# EAGLE board water_level (EAGLE 7.3.0)
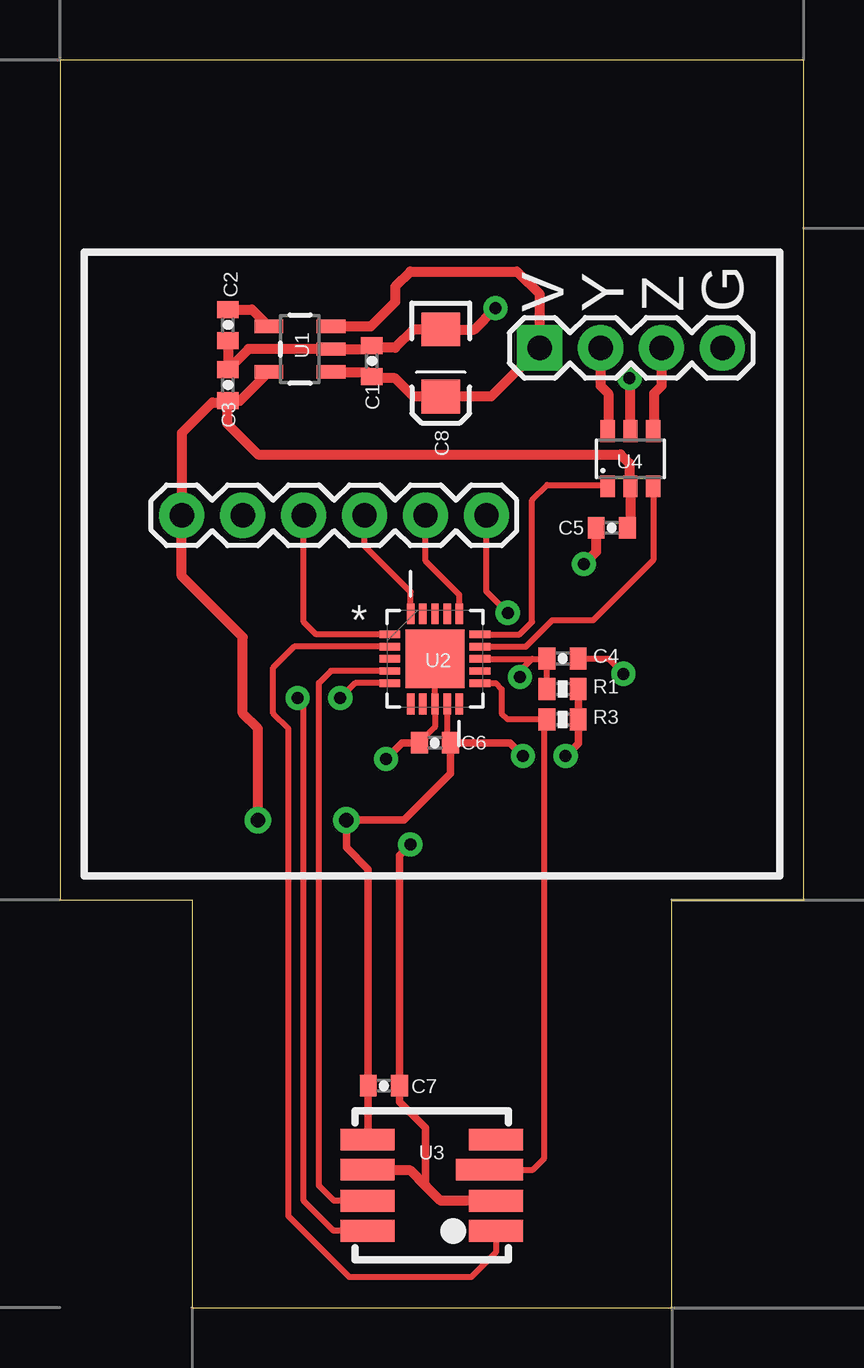
[diagram p0: board, top side]
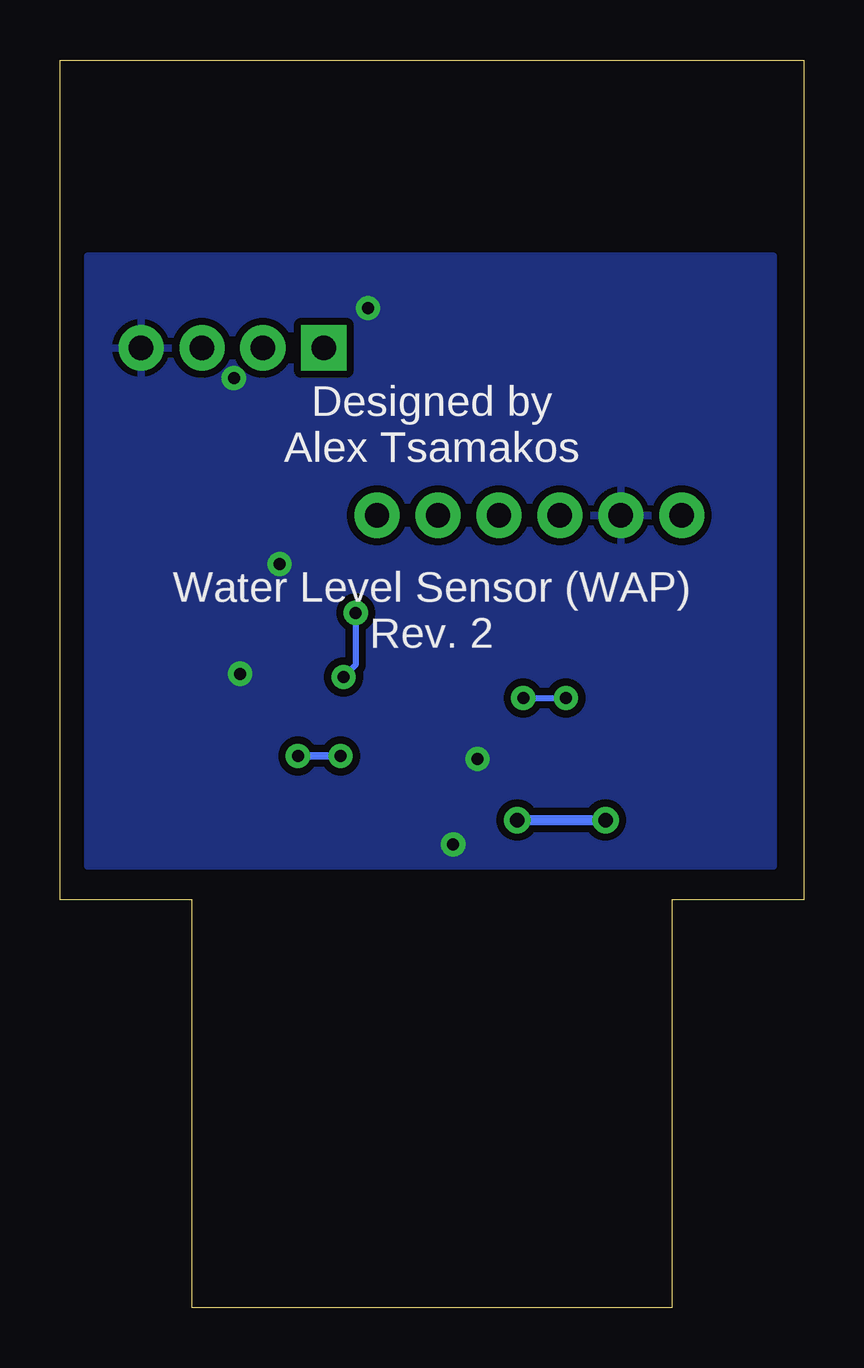
[diagram p1: board, bottom side, seen from below]

Size 31 x 52 mm. Coordinates in mm from the lower left corner, seen from the top.
Outline: 5.5,0 25.5,0 25.5,17 31,17 31,52 0,52 0,17 5.5,17 5.5,0
Copper layers (1*16): Top 0.035mm / dielectric 1.5mm / Bottom 0.035mm
Design rules "SparkFun-2-layer": minimum track width 7mil, minimum drill 15mil, track to track 8mil, track to pad 8mil, pad to pad 8mil, via to via 8mil, smd to smd 8mil, copper to edge 8mil, drill to drill 8mil, minimum pad ring 12mil, minimum via ring 10mil, stop-mask expansion 4mil, vias tented up to drill 20mil, thermal gap 10mil

## Footprints (pad centres in the part's own frame; a part is rotated, then mirrored left to right if it is on the bottom)
0402-CAP = smd 0.7 x 0.9: 1 -0.65,0; 2 0.65,0
EIA3216 = smd 1.4 x 1.6: A 1.4,0; C -1.4,0
1X06 = drill 1.016 pad 1.88: 1 0,0; 2 2.54,0; 3 5.08,0; 4 7.62,0; 5 10.16,0; 6 12.7,0
1X04 = drill 1.016 pad 1.88 square: 1 0,0 | drill 1.016 pad 1.88: 2 2.54,0; 3 5.08,0; 4 7.62,0
0402-RES = smd 0.7 x 0.9: 1 -0.65,0; 2 0.65,0
SOT23-5 = smd 0.55 x 1.2: 1 -0.95,-1.3; 2 0,-1.3; 3 0.95,-1.3; 4 0.95,1.3; 5 -0.95,1.3
QFN50P400X400X80-21N = smd 0.864 x 0.305: 1 -1.88,1.016; 2 -1.88,0.508; 3 -1.88,0; 4 -1.88,-0.508; 5 -1.88,-1.016; 11 1.88,-1.016; 12 1.88,-0.508; 13 1.88,0; 14 1.88,0.508; 15 1.88,1.016 | smd 0.305 x 0.864: 6 -1.016,-1.88; 7 -0.508,-1.88; 8 0,-1.88; 9 0.508,-1.88; 10 1.016,-1.88; 16 1.016,1.88; 17 0.508,1.88; 18 0,1.88; 19 -0.508,1.88; 20 -1.016,1.88 | smd 2.438 x 2.438: GND_PAD 0,0
MS5803 = smd 2.25 x 0.9: 1 -2.675,1.9; 2 -2.675,0.65; 4 -2.675,-1.9; 5 2.675,-1.9; 6 2.675,-0.65; 7 2.675,0.65; 8 2.675,1.9 | smd 2.8 x 0.9: 3 -2.4,-0.65
SOT23-6 = smd 0.6 x 0.9: 1 -0.95,-1.15; 2 0,-1.15; 3 0.95,-1.15; 4 0.95,1.15; 5 0,1.15; 6 -0.95,1.15

## Placement (x,y rotation side)
C1  2.2uF  [0402-CAP]  13.01,39.45 90 top
C2  10nF  [0402-CAP]  7,40.95 270 top
C3  2.2uF  [0402-CAP]  7,38.45 90 top
C4  100nF  [0402-CAP]  20.95,27.05 0 top
C5  100nF  [0402-CAP]  23,32.5 180 top
C6  100nF  [0402-CAP]  15.63,23.54 180 top
C7  100nF  [0402-CAP]  13.5,9.25 0 top
C8  10uF/16v  [EIA3216]  15.88,39.37 270 top
JP1  [1X06]  17.78,33.02 180 top
JP2  [1X04]  20,40 0 top
R1  10K  [0402-RES]  20.95,25.78 0 top
R3  10K  [0402-RES]  20.95,24.51 0 top
U1  LP3985  [SOT23-5]  10.01,39.95 90 top
U2  ATTINY441-MU  [QFN50P400X400X80-21N]  15.63,27.04 0 top
U3  MS5803-14BA  [MS5803]  15.5,5.1 180 top
U4  ISL32614E  [SOT23-6]  23.78,35.38 0 top

## Library data of the parts
C1-C7 = SparkFun-Capacitors
C8 = SparkFun-Capacitors; PROD_ID: CAP-00811
JP1 = SparkFun-Connectors; PROD_ID: CONN-08437
JP2 = SparkFun-Connectors
R1 R3 = SparkFun-Resistors
U1 = lp3985
U2 = Atmel-ATTINY441-MU; MPN: ATTINY441-MU; OC_FARNELL: 1748545; OC_NEWARK: 26R5651; PACKAGE: QFN-20; SUPPLIER: Atmel
U3 = MS5803; PROD_ID: IC-12111
U4 = ISL32614E

## Nets
3.3V: C3.1 C5.1 C6.1 C7.1 JP1.6 R1.2 R3.2 U1.5 U2.9 U3.5 U4.2
CS: R3.1 U2.11 U3.3
DE: U2.14 U4.3
GND: C1.2 C2.2 C3.2 C4.2 C5.2 C6.2 C7.2 C8.C JP1.5 JP2.4 U1.2 U2.8 U2.GND_PAD U3.2 U3.6 U4.5
MISO: U2.5 U3.8
MISO_ISP: JP1.3 U2.20
MOSI: U2.4 U3.7
MOSI_ISP: JP1.2 U2.16
N$5: C2.1 U1.4
RESET: C4.1 JP1.1 R1.1 U2.13
SCK: U2.2 U3.1
SCK_ISP: JP1.4 U2.1
TX: U2.15 U4.1
VIN: C1.1 C8.A JP2.1 U1.1 U1.3
Y: JP2.2 U4.6
Z: JP2.3 U4.4

## Tracks (layer width: path | path; a pad name or v marks a point on that pad's centre or on a via)
3.3V  (via drill 0.5, 0.6)
  Top 0.254: U2.9 16.14,23.68 C6.1
  Top 0.305: v19.3,22.99 18.75,23.54 C6.1 16.29,22.25 14.35,20.32 v11.94,20.32 11.94,19.18 12.85,18.27 C7.1 12.85,7.03 U3.5 | R1.2 R3.2 21.61,23.51 v21.08,22.99
  Top 0.406: C5.1 23.78,32.63 U4.2 23.75,34.26 23.75,35.18 23.37,35.56 8.26,35.56 6.99,36.83 6.99,37.78 C3.1 | C3.1 7.5,37.8 U1.5 | C3.1 6.92,37.72 6.35,37.72 5.08,36.45 JP1.6 5.08,30.48 7.62,27.94 7.62,24.77 8.26,24.13 v8.26,20.32
  Bottom 0.305: v19.3,22.99 v21.08,22.99
  Bottom 0.406: v11.94,20.32 v8.26,20.32
CS
  Top 0.254: U3.3 19.72,5.75 20.19,6.22 20.19,24.4 R3.1 | 20.32,24.5 R3.1 | R3.1 18.67,24.51 18.41,24.77 18.41,25.78 18.17,26.02 U2.11
DE
  Top 0.254: U2.14 19.42,27.55 20.52,28.64 22.23,28.64 24.73,31.15 U4.3
GND  (via drill 0.5)
  Top 0.254: C6.2 15.63,24.19 U2.8 U2.GND_PAD | C4.2 22.86,27.05 v23.5,26.42
  Top 0.305: 15.24,5.08 15.24,7.49 14.15,8.58 C7.2 14.15,18.85 v14.61,19.3 | C6.2 14.27,23.54 v13.59,22.86
  Top 0.406: C2.2 C3.2 7.86,39.95 U1.2 12.86,39.95 C1.2 13.1,40.01 13.97,40.01 14.73,40.77 C8.C 17.27,40.77 v18.16,41.66 | U3.2 15.87,4.45 15.24,5.08 14.61,5.71 12.86,5.71 U3.6 | 27.69,40.07 JP2.4 | C5.2 22.35,31.49 v21.84,30.99 | U4.5 23.78,38.7 v23.75,38.73
  pour Bottom (isolate 0.305): 1.27,43.81 1.27,18.41 29.84,18.41 29.84,43.81
MISO  (via drill 0.5)
  Top 0.254: U3.8 11.4,3.2 10.16,4.45 10.16,25.15 v9.91,25.4 | U2.5 12.31,26.02 v11.68,25.4
  Bottom 0.254: v11.68,25.4 v9.91,25.4
MISO_ISP
  Top 0.254: U2.20 14.62,29.83 12.7,31.75 JP1.3
MOSI
  Top 0.254: U3.7 11.43,4.45 10.79,5.08 10.79,26.04 11.29,26.53 U2.4
MOSI_ISP
  Top 0.254: U2.16 16.65,29.7 15.24,31.11 JP1.2
N$5
  Top 0.406: C2.1 8.01,41.6 U1.4
RESET  (via drill 0.5)
  Top 0.254: R1.1 C4.1 19.68,27.04 | v18.67,28.96 17.78,29.84 JP1.1 | U2.13 19.68,27.04 | v19.18,26.28 19.18,26.53 19.68,27.04
  Bottom 0.254: v18.67,28.96 18.67,26.79 v19.18,26.28
SCK
  Top 0.254: U3.1 18.18,2.3 17.14,1.27 12.06,1.27 9.53,3.81 9.53,24.13 8.89,24.77 8.89,26.67 9.77,27.55 U2.2
SCK_ISP
  Top 0.254: U2.1 10.68,28.06 10.16,28.57 JP1.4
TX
  Top 0.254: U4.1 22.77,34.29 20.32,34.29 19.68,33.66 19.68,28.57 19.17,28.06 U2.15
VIN
  Top 0.406: U1.1 12.8,39 C1.1 13.07,38.73 13.97,38.73 14.73,37.97 C8.A 17.97,37.97 JP2.1 20,42.23 19.05,43.18 14.61,43.18 13.97,42.55 13.97,41.91 12.96,40.9 U1.3
Y
  Top 0.406: JP2.2 22.54,38.42 22.86,38.1 22.86,36.56 U4.6
Z
  Top 0.406: JP2.3 25.08,38.41 24.77,38.1 24.77,36.57 U4.4

## Text on the board
tPlace: V | Y | Z | G
bPlace: Designed by / Alex Tsamakos | Water Level Sensor (WAP) / Rev. 2